# Altium PCB MainPCBV6.PcbDoc (part 5 of 5)
Units mm, origin at the board's own origin, x right, y up, seen from the top; angles counter-clockwise.
Board outline 176 x 144.01 mm, 2 copper layers (Top Layer, Bottom Layer); 220 components, 240 nets, 911 pads, 254 vias.
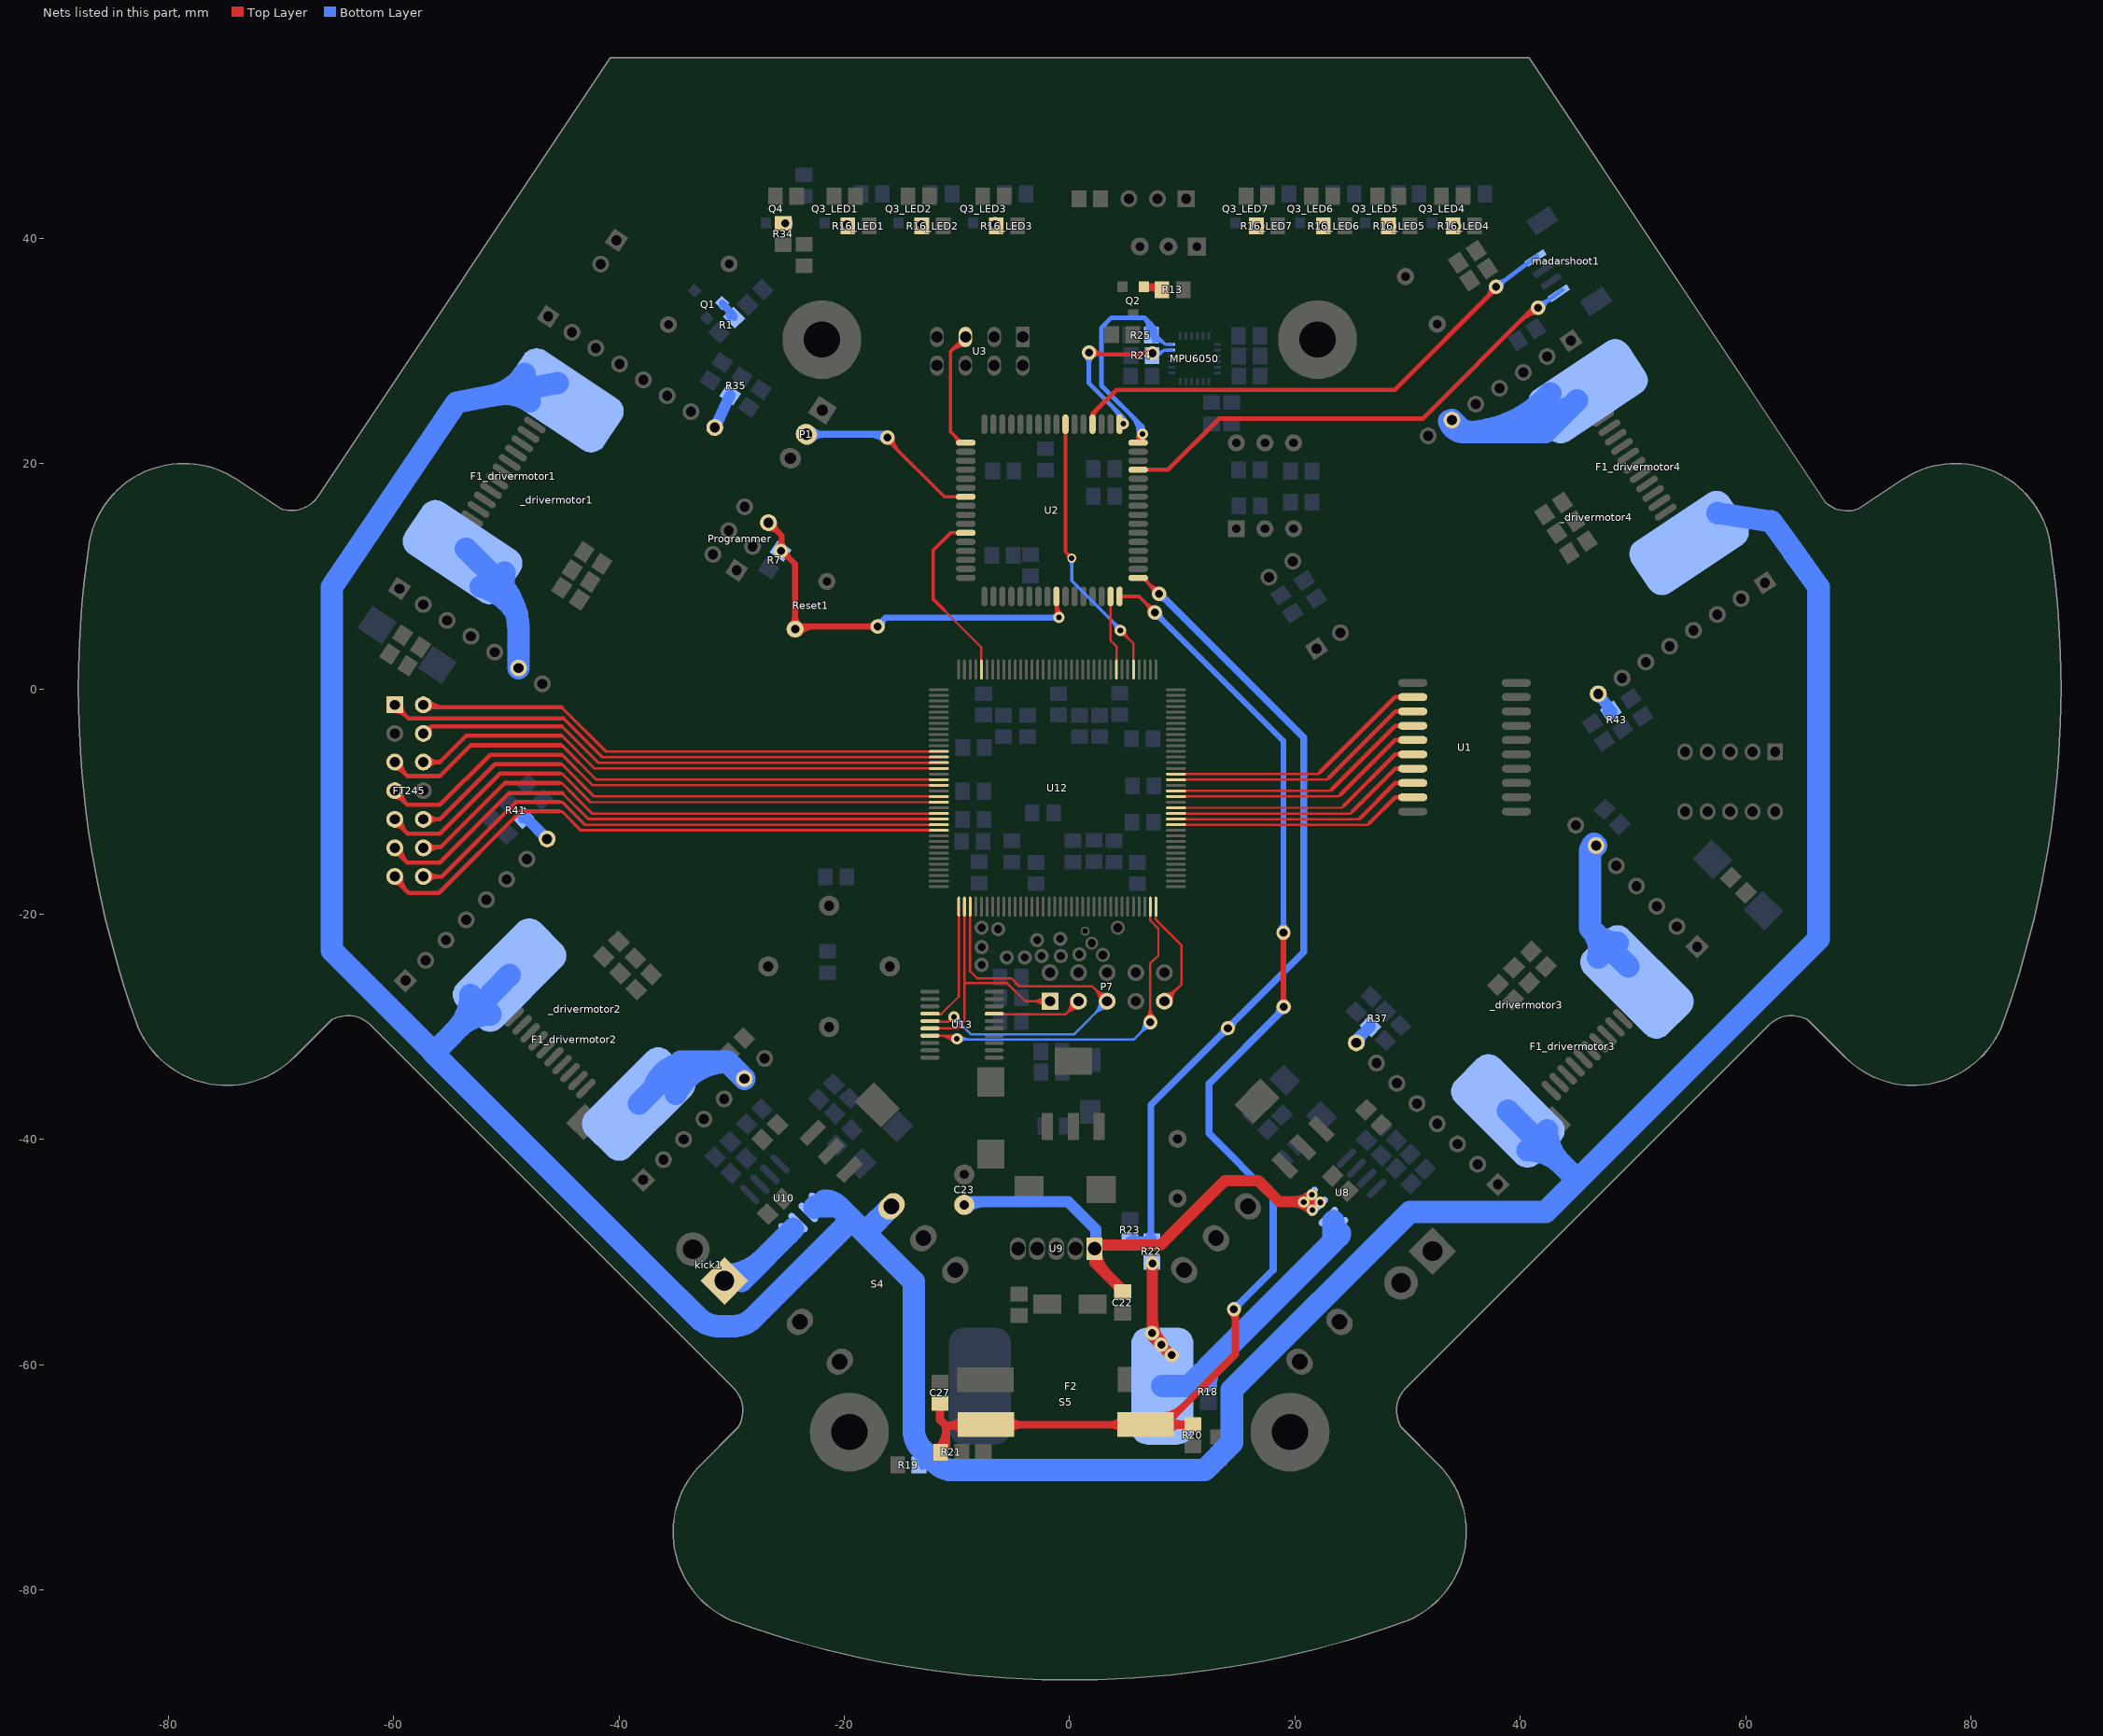
[diagram p5: the nets of this part, all layers, seen from the top]

## Via types
v1: diameter 1.27, hole 0.711, Top Layer to Bottom Layer, 214 vias
v2: diameter 1, hole 0.5, Top Layer to Bottom Layer, 17 vias
v3: diameter 2, hole 1, Top Layer to Bottom Layer, 11 vias
v4: diameter 0.8, hole 0.5, Top Layer to Bottom Layer, 8 vias
v5: diameter 1.778, hole 0.965, Top Layer to Bottom Layer, 3 vias
v6: diameter 0.75, hole 0.5, Top Layer to Bottom Layer, 1 vias

## Nets (pads, with @x,y where several pads share a name; then routed paths per layer and width w, separated by ;. In a path a pad name is that pad's centre, name@x,y a point inside that pad or via, vN(x,y) a via of type N, cw(c..) or ccw(c..) an arc to the next point about the centre after c; other vN are vias at no path point) (continued)
NetProgrammer_5: Programmer.5 R7.2 Reset1.2 U2.57 | length 50.2
  Top Layer w0.305: U2.57@-1.261,7.513 cw(c-1.471,7.304) -1.175,7.304 cw(c-0.879,7.304) U2.57@-1.088,7.513 ; -1.175,6.959 ccw(c-0.356,6.959) v2@-0.935,6.38 ; U2.57@-1.175,7.695 ccw(c0.38,7.695) v2@-0.719,6.596 ; U2.57@-1.175,8.2 -1.175,6.737 -1.067,6.629 -1.067,6.325 -1.016,6.274 -0.991,6.274 -0.965,6.299 v2(-0.965,6.35)
  Top Layer w0.508: Programmer.5@-26.744,14.248 cw(c-26.744,12.961) -25.834,13.871 ; Programmer.5@-26.721,14.757 -25.552,13.589 -25.552,12.268 -24.384,11.1 -24.384,5.41 -24.257,5.537 v1(-17.043,5.537) ; Programmer.5@-26.248,14.744 ccw(c-25.14,14.744) -25.924,13.96 ; v1@-25.898,12.512 ccw(c-26.732,13.347) -25.552,13.347 ; v1@-25.629,11.862 cw(c-25.629,10.697) -24.805,11.521 ; -25.552,12.979 ccw(c-24.893,12.979) v1@-25.359,12.512 ; v1@-25.248,12.243 ccw(c-24.573,12.243) -25.05,11.766 ; Reset1.2@-24.73,5.663 ccw(c-25.564,6.497) -24.384,6.497 ; -24.384,6.562 ccw(c-23.112,6.562) Reset1.2@-24.011,5.663 ; Reset1.2@-24.011,4.944 cw(c-22.58,3.513) -22.58,5.537 ; v1@-17.313,5.268 ccw(c-17.963,4.617) -17.963,5.537 ccw(c-17.963,6.457) v1@-17.313,5.807
  Bottom Layer w0.508: v1@-17.043,5.918 ccw(c-17.043,6.593) -16.566,6.116 ; v1@-16.713,5.969 -16.358,6.325 ; v1@-16.663,5.55 cw(c-15.62,5.587) -16.358,6.325 ; -1.62,6.325 ccw(c-1.62,7.005) v2@-1.139,6.524 ; -1.498,6.325 cw(c-1.498,5.817) v2@-1.139,6.176 ; v2(-0.965,6.35) -0.965,6.299 -0.991,6.274 -1.016,6.274 -1.067,6.325 -16.358,6.325
  other v1: -25.629,12.243
NetQ1_2: Q1.2 R1.2 | length 3.3
  Bottom Layer w0.6: Q1.2@-30.876,34.093 cw(c-31.042,33.472) -30.486,33.794 ; Q1.2@-30.855,34.256 -29.783,33.184 R1.2@-29.783,32.955 ; Q1.2@-30.613,34.014 cw(c-31.6,33.026) R1.2@-30.204,33.026
NetQ2_2: Q2.2 R13.1 | length 3.4
  Top Layer w0.6: Q2.2@6.589,35.692 7.935,35.692 R13.1@8.194,35.433 ; Q2.2@6.664,35.537 cw(c7.052,34.865) 7.253,35.615 ; Q2.2@6.964,35.692 cw(c6.964,34.303) R13.1@7.947,35.286
NetQ3_Led1_2: Q3_LED1.2 R16_LED1.2
  other v1: -19.761,41.224
NetQ3_Led2_2: Q3_LED2.2 R16_LED2.2
  other v1: -13.157,41.224
NetQ3_Led3_2: Q3_LED3.2 R16_LED3.2
  other v1: -6.629,41.25
NetQ3_LED4_2: Q3_LED4.2 R16_LED4.2
  other v1: 34.138,41.072
NetQ3_LED5_2: Q3_LED5.2 R16_LED5.2
  other v1: 28.372,41.072
NetQ3_LED6_2: Q3_LED6.2 R16_LED6.2
  other v1: 22.53,41.072
NetQ3_LED7_2: Q3_LED7.2 R16_LED7.2
  other v1: 16.637,41.072
NetQ4_2: Q4.2 R34.2
  other v1: -25.248,41.326
PARITY: U2.63 U12.44 | length 7.4
  Top Layer w0.203: U2.63@3.503,7.477 cw(c3.207,7.181) 3.625,7.181 cw(c4.044,7.181) U2.63@3.748,7.477 ; U2.63@3.625,8.2 3.625,4.3 4.158,3.767 U12.44@4.158,1.711
PROG_B: U12.143 U13.7 | length 43
  Top Layer w0.203: U13.7@-12.4,-30.845 -12.365,-30.81 -10.262,-30.81 v2(-10.008,-31.064) ; U13.7@-11.673,-30.743 ccw(c-11.511,-30.58) -11.511,-30.81 ; U13.7@-11.583,-30.81 cw(c-11.583,-32.639) v2@-10.289,-31.346 ; -11.092,-30.81 cw(c-11.092,-32.149) v2@-10.146,-31.202 ; -10.601,-30.81 cw(c-10.601,-31.658) v2@-10.002,-31.059 ; v1@6.786,-29.214 ccw(c5.936,-28.365) 7.137,-28.365 ; v1@6.929,-29.358 ccw(c6.427,-28.855) 7.137,-28.855 ; v1@7.137,-29.566 7.137,-24.409 7.874,-23.673 7.874,-21.285 7.158,-20.569 U12.143@7.158,-19.339 ; 7.137,-28.733 ccw(c8.021,-28.733) v1@7.396,-29.358 ; 7.137,-28.242 ccw(c8.512,-28.242) v1@7.54,-29.214
  Bottom Layer w0.203: v2@-9.957,-31.064 -9.906,-31.115 5.715,-31.115 7.048,-29.781 v1@7.252,-29.781 ; v2@-9.87,-30.926 ccw(c-9.414,-30.47) -9.414,-31.115 ; v2@-9.726,-31.346 cw(c-9.168,-31.903) -9.168,-31.115 ; v2@-9.726,-30.782 ccw(c-8.923,-29.98) -8.923,-31.115 ; 6.198,-30.632 ccw(c5.158,-29.591) v1@6.629,-29.591 ; 6.382,-30.448 cw(c7.163,-31.228) v1@7.163,-30.124 ; 6.545,-30.285 ccw(c5.851,-29.591) v1@6.833,-29.591 ; 6.729,-30.101 cw(c7.163,-30.534) v1@7.163,-29.921
  other v1: 7.163,-29.591
SCK: U2.33 U3.5 | length 13.9
  Top Layer w0.305: -10.592,22.809 -10.592,29.947 ; -10.566,22.809 -9.607,21.85 U2.33@-9.225,21.85 ; -10.188,22.431 cw(c-10.77,21.85) U2.33@-9.947,21.85 ; -10.079,30.46 cw(c-9.259,29.64) U3.5@-9.247,30.799 ; U3.5@-9.25,30.494 ccw(c-9.269,28.624) -10.592,29.947 ; U3.5@-9.22,31.318 -10.592,29.947
SCK_CUR1: U2.43 U12.68 | length 16.4
  Top Layer w0.203: -11.151,6.985 -7.849,3.683 -7.849,3.092 -7.842,3.085 U12.68@-7.842,1.711
  Top Layer w0.305: -11.151,6.985 -12.116,7.95 -12.116,12.301 -10.568,13.85 U2.43@-9.225,13.85 ; U2.43@-9.911,13.763 ccw(c-10.121,13.554) -10.121,13.85 ccw(c-10.121,14.146) U2.43@-9.911,13.936
SCK_CUR2: U2.23 U12.41 | length 29.5
  Top Layer w0.203: v2@4.496,4.783 cw(c4.496,3.821) 5.176,4.501 cw(c5.856,5.182) v2@4.894,5.182 ; v2(4.496,5.182) 5.658,4.02 U12.41@5.658,1.711
  Top Layer w0.305: U2.23@-0.461,22.813 cw(c-0.671,22.604) -0.375,22.604 cw(c-0.079,22.604) U2.23@-0.288,22.813 ; U2.23@-0.375,23.5 -0.375,12.16 v4(0.178,11.608) ; v4@-0.07,11.608 ccw(c-0.668,11.608) -0.245,12.03 ccw(c0.178,12.453) v4@0.178,11.855
  Bottom Layer w0.305: v4@0.003,11.433 cw(c-0.42,11.01) 0.178,11.01 cw(c0.776,11.01) v4@0.353,11.433 ; v4(0.178,11.608) 0.178,9.601 4.496,5.283 v2(4.496,5.182) ; 3.831,5.948 cw(c3.064,5.182) v2@4.148,5.182 ; 4.076,5.703 ccw(c4.496,6.123) v2@4.496,5.529
SEG1A: U1.9 U12.12 | length 22.6
  Top Layer w0.203: U12.12@9.433,-12.064 26.468,-12.064 26.645,-11.887
  Top Layer w0.381: 26.645,-11.887 28.905,-9.627 U1.9@30.452,-9.627 ; U1.9@29.389,-9.739 ccw(c29.117,-10.012) 29.117,-9.627 ccw(c29.117,-9.242) U1.9@29.389,-9.514
SEG1B: U1.4 U12.18 | length 24
  Top Layer w0.203: U12.18@9.433,-9.064 23.118,-9.064 23.266,-8.915
  Top Layer w0.381: 23.266,-8.915 28.905,-3.277 U1.4@30.452,-3.277 ; U1.4@29.389,-3.389 ccw(c29.117,-3.662) 29.117,-3.277 ccw(c29.117,-2.892) U1.4@29.389,-3.164
SEG1C: U1.3 U12.20 | length 24.2
  Top Layer w0.203: U12.20@9.433,-8.064 22.848,-8.064 23.012,-7.899
  Top Layer w0.381: 23.012,-7.899 28.905,-2.007 U1.3@30.452,-2.007 U1.3@30.401,-1.956 ; U1.3@29.389,-2.119 ccw(c29.117,-2.392) 29.117,-2.007 ccw(c29.117,-1.622) U1.3@29.389,-1.894
SEG1D: U1.5 U12.17 | length 23.7
  Top Layer w0.203: U12.17@9.433,-9.564 23.888,-9.564 24.066,-9.385
  Top Layer w0.381: 24.066,-9.385 28.905,-4.547 U1.5@30.452,-4.547 ; U1.5@29.389,-4.659 ccw(c29.117,-4.932) 29.117,-4.547 ccw(c29.117,-4.162) U1.5@29.389,-4.434
SEG1DP: U1.2 U12.21 | length 24.5
  Top Layer w0.203: U12.21@9.433,-7.564 22.078,-7.564 22.238,-7.404
  Top Layer w0.381: 22.238,-7.404 28.905,-0.737 U1.2@30.452,-0.737 ; U1.2@29.389,-0.849 ccw(c29.117,-1.122) 29.117,-0.737 ccw(c29.117,-0.352) U1.2@29.389,-0.624
SEG1E: U1.6 U12.15 | length 23.6
  Top Layer w0.203: U12.15@9.433,-10.564 24.158,-10.564 24.447,-10.274
  Top Layer w0.381: 24.447,-10.274 28.905,-5.817 U1.6@30.452,-5.817 ; U1.6@29.389,-5.929 ccw(c29.117,-6.202) 29.117,-5.817 ccw(c29.117,-5.432) U1.6@29.389,-5.704
SEG1F: U1.8 U12.13 | length 23
  Top Layer w0.203: U12.13@9.433,-11.564 25.698,-11.564 25.832,-11.43
  Top Layer w0.381: 25.832,-11.43 28.905,-8.357 U1.8@30.452,-8.357 ; U1.8@29.389,-8.469 ccw(c29.117,-8.742) 29.117,-8.357 ccw(c29.117,-7.972) U1.8@29.389,-8.244
SEG1G: U1.7 U12.14 | length 23.3
  Top Layer w0.203: U12.14@9.433,-11.064 24.928,-11.064 25.146,-10.846
  Top Layer w0.381: 25.146,-10.846 28.905,-7.087 U1.7@30.452,-7.087 ; U1.7@29.389,-7.199 ccw(c29.117,-7.472) 29.117,-7.087 ccw(c29.117,-6.702) U1.7@29.389,-6.974
SEN-SCL: MPU6050.23 R24.2 U2.17 | length 26
  Top Layer w0.4: v1@1.702,29.845 1.854,29.693 7.182,29.693 7.334,29.54 7.366,29.572 7.366,29.667 7.341,29.693 v1(7.341,29.794) ; v1@2.035,29.537 cw(c2.409,29.163) 2.409,29.693 ; v1@2.035,30.153 ccw(c3.145,31.263) 3.145,29.693 ; U2.17@4.425,23.5 v2@4.826,23.5 ; 6.045,29.693 ccw(c6.045,31.09) v1@7.033,30.102 ; 6.536,29.693 cw(c6.536,28.989) v1@7.033,29.487
  Bottom Layer w0.254: R24.2@7.336,29.702 ccw(c7.673,30.039) 8.01,29.702 ; v1(7.341,29.794) 7.341,29.693 7.366,29.667 7.366,29.572 7.334,29.54 7.849,29.54 8.37,30.062 ; R24.2@7.515,29.881 ccw(c7.853,30.219) 8.19,29.882 ; R24.2@7.695,30.061 ccw(c8.032,30.399) 8.37,30.062 ; MPU6050.23@9.057,30.062 8.37,30.062
  Bottom Layer w0.4: v1@1.42,29.537 cw(c0.738,28.856) 1.702,28.856 ; 1.702,28.733 cw(c2.839,28.733) v1@2.035,29.537 ; v1@1.702,29.439 1.702,27.127 4.775,24.054 ; 3.904,24.925 cw(c2.525,23.546) v2@4.475,23.546 ; 4.587,24.242 cw(c3.89,23.546) v2@4.875,23.546 ; v2@4.63,23.809 ccw(c4.495,24.054) 4.775,24.054 ; v2@4.775,23.444 4.775,24.054 ; v2@4.92,23.809 cw(c5.055,24.054) 4.775,24.054
  other v1: 1.727,29.845
  other v2: 4.775,23.546
SEN-SDA: MPU6050.24 R25.2 U2.16 | length 33.1
  Top Layer w0.4: U2.16@6.075,21.764 cw(c6.67,21.764) v2@6.525,22.34 ; U2.16@6.075,21.85 6.075,22.255 ; 6.075,22.277 cw(c6.541,22.277) v2@6.427,22.728 ; v2@6.16,22.56 cw(c5.847,22.483) 6.075,22.255 ; v2@6.38,22.34 ccw(c6.303,22.027) 6.075,22.255 ; v2(6.452,22.631) 6.075,22.255
  Bottom Layer w0.254: R25.2@7.254,31.28 cw(c7.476,30.666) 7.938,31.128 ; R25.2@7.292,31.302 7.764,31.302 8.504,30.562 ; R25.2@7.34,31.041 cw(c7.626,30.25) 8.221,30.845 ; R25.2@7.426,30.802 cw(c7.775,29.833) 8.504,30.562 ; MPU6050.24@9.057,30.562 8.504,30.562
  Bottom Layer w0.4: 5.472,24.271 cw(c3.833,22.631) v2@6.152,22.631 ; 6.155,23.588 cw(c5.199,22.631) v2@6.552,22.631 ; v2@6.254,22.857 ccw(c5.875,23.292) 6.452,23.292 ; v2(6.452,22.631) 6.452,23.292 ; v2@6.649,22.857 cw(c7.028,23.292) 6.452,23.292 ; R25.2@6.843,31.689 ccw(c5.851,32.165) 6.629,32.944 ; 7.029,32.545 cw(c6.391,31.906) R25.2@7.204,31.516 ; R25.2@7.053,31.899 ccw(c6.867,32.281) 7.292,32.281 ; R25.2@7.292,31.302 7.292,32.281 ; 7.428,32.145 cw(c6.93,31.648) R25.2@7.565,31.343 ; R25.2@7.509,31.862 cw(c7.806,32.281) 7.292,32.281 ; 6.452,23.292 2.819,26.924 2.819,32.055 3.708,32.944 6.629,32.944 ; 6.629,32.944 7.292,32.281
ST_SHG: madarshoot1.4 U2.20 | length 49.9
  Top Layer w0.4: U2.20@2.025,23.5 2.025,24.403 4.166,26.543 28.854,26.543 v1@37.821,35.509 ; U2.20@2.1,24.1 cw(c3.013,24.1) 2.367,24.745 ; 36.996,34.684 ccw(c35.993,35.687) v1@37.411,35.687 ; 37.364,35.052 cw(c37.846,34.57) v1@37.846,35.252
  Bottom Layer w0.4: v1(37.846,35.687) 41.32,38.286 madarshoot1.4@41.478,38.405 ; v1@37.908,36.118 ccw(c38.058,37.157) 38.687,36.316 ccw(c39.316,35.475) v1@38.277,35.625
SW1: F2.1 R18.2 R22.2 U8.1 U8.2 | length 41.2
  Top Layer w1: 7.341,-55.99 ccw(c10.355,-55.99) v1@8.223,-58.121 ; v1(7.341,-51.003) 7.341,-57.48 v1@8.915,-59.055 ; v1@7.45,-57.201 ccw(c8.389,-57.201) v1@7.725,-57.865 ; v1@7.607,-57.66 ccw(c8.4,-57.202) v1@8.163,-58.086
  Bottom Layer w0.5: R18.2@12.111,-61.2 ccw(c11.485,-60.575) 12.37,-60.575 ; 12.192,-60.198 12.243,-60.249 12.37,-60.376 R18.2@12.37,-61.382 ; 12.37,-60.46 ccw(c13.417,-60.46) R18.2@12.676,-61.2
  Bottom Layer w1: R22.2@7.278,-51.003 R22.2@7.278,-50.938
  Bottom Layer w2: F2.1@8.227,-61.9 10.592,-61.9 11.74,-60.752 ; F2.1@10.768,-61.724 cw(c12.194,-63.15) R18.2@12.194,-61.133 ; R18.2@12.044,-61.483 cw(c14.543,-61.483) 12.776,-59.716 ; 12.243,-60.249 23.419,-49.073 23.419,-47.295 ; 23.866,-48.625 ccw(c23.555,-48.314) 23.995,-48.314 cw(c23.555,-48.314) 23.866,-48.625
  other v1: 9.042,-59.157 8.128,-58.217 7.315,-57.201
SW2: F1_drivermotor1.2 F1_drivermotor2.2 F1_drivermotor3.2 F1_drivermotor4.2 R19.2 S4.1 U10.1 U10.2 | length 344.6
  Bottom Layer w0.5: R19.2@-13.198,-68.859 -11.836,-68.859 ; R19.2@-13.093,-69.093 cw(c-12.529,-69.657) -12.529,-68.859 ; R19.2@-13.093,-68.527 ccw(c-12.291,-67.726) -12.291,-68.859
  Bottom Layer w2: -65.507,-22.987 -65.507,-23.216 -65.498,-23.224 ; -56.464,-32.36 -34.633,-54.191 ; -54.431,-30.266 ccw(c-57.552,-27.236) F1_drivermotor2.2@-53.203,-27.171 ; -54.308,-30.139 cw(c-51.365,-32.995) F1_drivermotor2.2@-51.427,-28.895 ; -51.322,26.018 ccw(c-52.193,30.513) F1_drivermotor1.2@-48.399,27.95 ; -50.831,26.113 cw(c-50.094,22.312) F1_drivermotor1.2@-47.928,25.521 ; F1_drivermotor2.2@-49.72,-25.413 -56.413,-32.309 -65.498,-23.224 ; F1_drivermotor1.2@-45.466,27.153 -54.436,25.414 -65.498,9.034 -65.498,-23.224 ; -34.62,-54.178 -32.951,-55.847 ccw(c-31.155,-54.051) -31.513,-56.566 ccw(c-31.155,-54.051) -31.155,-56.591 -29.881,-56.591 ccw(c-29.881,-54.051) -29.523,-56.566 ccw(c-29.881,-54.051) -28.085,-55.847 -19.355,-47.117 ; -22.657,-46.05 -22.553,-45.947 -20.523,-45.947 -20.523,-45.949 ; -21.77,-45.454 cw(c-21.72,-47.145) -20.523,-45.949 ; -21.749,-45.453 cw(c-21.749,-47.217) -20.502,-45.97 ; S4.1@-15.816,-45.947 -17.996,-48.127 -17.996,-48.476 ; -12.002,-68.643 -13.099,-67.546 cw(c-11.303,-65.75) -13.843,-65.75 -13.843,-52.629 -17.996,-48.476 ; -11.801,-68.824 ccw(c-10.206,-66.847) -10.518,-69.367 11.963,-69.367 14.402,-66.929 14.402,-62.23 30.201,-46.431 42.24,-46.431 45.072,-43.599 ; F1_drivermotor3.2@38.9,-37.478 45.072,-43.599 ; F1_drivermotor3.2@40.64,-40.96 cw(c40.657,-45.219) 43.657,-42.195 ; F1_drivermotor3.2@42.383,-39.203 ccw(c46.573,-39.186) 43.622,-42.161 ; 45.085,-43.612 45.072,-43.599 ; F1_drivermotor4.2@57.531,15.596 62.275,14.858 64.186,12.243 66.472,9.043 66.472,-22.2 45.072,-43.599 ; -20.523,-45.949 -19.355,-47.117 ; -19.355,-47.117 -17.996,-48.476
SW-CAP: C27.1 R20.2 R21.2 S5.1 U2.64 | length 145.1
  Top Layer w0.305: U2.64@4.425,8.2 6.151,8.2 v1(7.569,6.782) ; U2.64@4.512,8.113 cw(c4.721,7.904) 4.721,8.2 cw(c4.721,8.496) U2.64@4.512,8.286 ; v1@7.087,6.782 ccw(c5.921,6.782) 6.745,7.606 ccw(c7.569,8.43) v1@7.569,7.264
  Top Layer w0.508: v1@18.704,-21.91 cw(c18.054,-22.561) 18.974,-22.561 cw(c19.894,-22.561) v1@19.243,-21.91 ; v1@18.73,-27.975 ccw(c18.141,-27.386) 18.974,-27.386 ; 18.974,-27.264 ccw(c19.98,-27.264) v1@19.269,-27.975 ; v1(18.974,-21.641) 18.974,-28.219 v1(18.999,-28.245)
  Top Layer w0.635: S5.1@-7.442,-65.329 S5.1@6.731,-65.329 ; S5.1@-5.489,-65.882 cw(c-4.153,-67.218) -4.153,-65.329 cw(c-4.153,-63.44) S5.1@-5.489,-64.775 ; S5.1@4.778,-65.882 ccw(c3.442,-67.218) 3.442,-65.329 ccw(c3.442,-63.44) S5.1@4.778,-64.775 ; S5.1@8.131,-64.546 ccw(c8.131,-61.867) 10.025,-63.762 ; S5.1@8.458,-65.329 14.707,-59.08 v1@14.707,-55.118 ; S5.1@8.914,-65.329 cw(c10.013,-65.329) 9.235,-64.552 ; v1@14.355,-55.317 cw(c13.506,-56.166) 14.707,-56.166
  Top Layer w0.75: C27.1@-11.701,-63.628 cw(c-12.17,-64.098) -11.506,-64.098 cw(c-10.842,-64.098) C27.1@-11.312,-63.628 ; R21.2@-11.66,-67.473 ccw(c-13.319,-65.814) -10.973,-65.814 ; R21.2@-11.608,-67.742 -10.973,-67.107 -10.973,-65.43 ; C27.1@-11.506,-63.434 -11.506,-64.897 -10.973,-65.43 ; -10.838,-65.43 ccw(c-10.838,-63.333) S5.1@-9.355,-64.816 ; -10.347,-65.43 cw(c-10.347,-66.834) S5.1@-9.355,-65.841 ; S5.1@-7.264,-65.43 -10.973,-65.43 ; S5.1@6.731,-65.329 8.458,-65.329 10.719,-65.329 R20.2@10.871,-65.176 ; S5.1@8.644,-65.841 cw(c9.881,-67.079) 9.881,-65.329 cw(c9.881,-63.578) S5.1@8.644,-64.816 ; 10.133,-65.329 ccw(c10.133,-64.63) R20.2@10.628,-65.124
  Bottom Layer w0.508: v1@7.569,6.401 cw(c7.569,5.481) 8.22,6.131 cw(c8.87,6.782) v1@7.95,6.782 ; v1(7.569,6.782) 18.974,-4.623 v1(18.974,-21.641) ; v1@18.704,-21.371 ccw(c18.054,-20.721) 18.974,-20.721 ccw(c19.894,-20.721) v1@19.243,-21.371
  Bottom Layer w0.635: v1(14.58,-55.093) 18.059,-51.613 18.059,-45.161 12.37,-39.472 12.37,-35.052 v1@18.771,-28.651 ; v1@14.58,-54.775 ccw(c14.58,-54.009) 15.122,-54.551 ccw(c15.664,-55.093) v1@14.897,-55.093 ; 18.331,-29.09 ccw(c17.486,-28.245) v1@18.682,-28.245
TCK: P7.1 U12.110 U13.6 | length 26
  Top Layer w0.203: U13.6@-12.4,-30.195 -12.355,-30.15 -9.982,-30.15 -9.342,-29.51 U12.110@-9.342,-19.339 ; U13.6@-11.673,-30.093 ccw(c-11.536,-29.955) -11.536,-30.15 ; -9.322,-26.137 -5.537,-26.137 -3.937,-27.737 P7.1@-1.753,-27.737 ; P7.1@-2.211,-28.195 ccw(c-3.318,-29.302) -3.318,-27.737 ccw(c-3.318,-26.171) P7.1@-2.211,-27.278 ; P7.1@-2.067,-28.052 ccw(c-2.827,-28.812) -2.827,-27.737 ccw(c-2.827,-26.662) P7.1@-2.067,-27.422
TDI: P7.9 U12.144 | length 14.1
  Top Layer w0.203: U12.144@7.658,-19.339 7.658,-20.499 8.607,-21.448 8.607,-21.46 9.931,-22.784 9.931,-26.213 P7.9@8.407,-27.737 ; P7.9@8.407,-27.292 ccw(c8.407,-26.217) 9.167,-26.977 ccw(c9.927,-27.737) P7.9@8.853,-27.737 ; P7.9@8.407,-27.088 ccw(c8.407,-25.523) 9.514,-26.63 ccw(c10.621,-27.737) P7.9@9.056,-27.737
TDO: P7.3 U13.17 | length 12.9
  Top Layer w0.203: U13.17@-6.7,-28.895 -0.371,-28.895 P7.3@0.787,-27.737 ; U13.17@-5.974,-28.793 ccw(c-5.726,-28.545) -5.726,-28.895 ; P7.3@0.139,-27.737 cw(c-1.426,-27.737) -0.319,-28.844 cw(c0.787,-29.951) P7.3@0.787,-28.385 ; P7.3@0.342,-27.737 cw(c-0.733,-27.737) 0.027,-28.497 cw(c0.787,-29.257) P7.3@0.787,-28.182
  Bottom Layer w0.203: P7.3@0.254,-27.737 P7.3@0.787,-27.737
TDO_OUT: U12.109 U13.4 | length 11.5
  Top Layer w0.203: U13.4@-12.4,-28.895 -11.42,-28.895 -9.842,-27.317 U12.109@-9.842,-19.339 ; U13.4@-11.673,-28.793 ccw(c-11.426,-28.545) -11.426,-28.895
TMS: P7.5 U12.111 U13.5 | length 48.2
  Top Layer w0.203: U13.5@-12.4,-29.545 -10.826,-29.545 ; U13.5@-11.673,-29.443 ccw(c-11.426,-29.195) -11.426,-29.545 ; v2@-10.66,-29.123 cw(c-11.227,-29.144) -10.826,-29.545 ; v2@-10.425,-29.472 ccw(c-10.572,-29.799) -10.826,-29.545 ; v2@-10.287,-29.007 -10.826,-29.545 ; U12.111@-8.842,-19.339 -8.842,-25.067 -8.204,-25.705 -5.182,-25.705 -4.47,-26.416 2.007,-26.416 P7.5@3.327,-27.737 ; P7.5@2.679,-27.737 ccw(c1.114,-27.737) 2.221,-26.63 ccw(c3.327,-25.523) P7.5@3.327,-27.088 ; P7.5@2.882,-27.737 ccw(c1.807,-27.737) 2.567,-26.977 ccw(c3.327,-26.217) P7.5@3.327,-27.292
  Bottom Layer w0.203: v2@-10.262,-29.507 cw(c-10.262,-30.346) -9.668,-29.753 ; v2@-10.109,-29.134 -10.109,-29.312 -8.738,-30.683 0.381,-30.683 P7.5@3.327,-27.737 ; v2@-10.066,-29.108 ccw(c-9.473,-29.108) -9.892,-29.528 ; v2@-9.863,-29.108 ccw(c-8.779,-29.108) -9.546,-29.875 ; P7.5@2.679,-27.737 cw(c1.114,-27.737) 2.221,-28.844 cw(c3.327,-29.951) P7.5@3.327,-28.385 ; P7.5@2.882,-27.737 cw(c1.807,-27.737) 2.567,-28.497 cw(c3.327,-29.257) P7.5@3.327,-28.182
  other v2: -10.262,-29.108
TX: P1.2 U2.39 | length 23.2
  Top Layer w0.305: v1@-16.256,22.174 -11.131,17.05 U2.39@-9.225,17.05 ; v1@-16.18,21.819 cw(c-16.18,21.144) -15.703,21.621 ; v1@-16.002,22.301 ccw(c-15.082,22.301) -15.733,21.651 ; v1@-15.697,22.301 ccw(c-14.042,22.301) -15.212,21.13 ; U2.39@-9.911,16.963 ccw(c-10.121,16.754) -10.121,17.05 ccw(c-10.121,17.346) U2.39@-9.911,17.136
  Bottom Layer w0.635: P1.2@-23.371,22.601 -16.556,22.601 v1@-16.154,22.2 ; P1.2@-22.918,22.162 cw(c-21.856,21.1) -21.856,22.601 ; P1.2@-22.918,22.985 ccw(c-21.99,23.913) -21.99,22.601 ; -17.671,22.601 cw(c-17.671,20.81) v1@-16.404,22.077
  other v1: -16.18,22.301
USB_D0: FT245.2 U12.84 | length 49.9
  Top Layer w0.203: -41.198,-5.564 U12.84@-11.617,-5.564
  Top Layer w0.254: -45.085,-1.651 -41.198,-5.538
  Top Layer w0.381: FT245.2@-57.252,-1.296 ccw(c-56.396,-0.44) -56.396,-1.651 ; FT245.2@-56.983,-1.818 cw(c-56.58,-2.221) -56.58,-1.651 ; FT245.2@-56.983,-1.027 ccw(c-55.476,0.48) -55.476,-1.651 ; FT245.2@-56.871,-1.676 -56.845,-1.651 -45.085,-1.651
USB_D1: FT245.6 U12.87 | length 50
  Top Layer w0.203: -42.212,-7.064 U12.87@-11.617,-7.064
  Top Layer w0.254: -45.123,-4.171 -45.08,-4.171 -42.212,-7.038
  Top Layer w0.381: FT245.6@-57.379,-6.502 -55.905,-6.502 -53.574,-4.171 -45.123,-4.171 ; FT245.6@-56.983,-6.898 cw(c-56.028,-7.853) -56.028,-6.502 cw(c-56.028,-5.152) FT245.6@-56.983,-6.107
USB_D2: FT245.4 U12.86 | length 48.5
  Top Layer w0.203: -41.874,-6.564 U12.86@-11.617,-6.564
  Top Layer w0.254: -45.082,-3.331 -41.874,-6.538
  Top Layer w0.381: FT245.4@-57.379,-4.039 -56.671,-3.331 ; FT245.4@-57.179,-3.44 ccw(c-57.009,-2.993) -56.671,-3.331 ; FT245.4@-56.83,-3.854 cw(c-56.261,-3.741) -56.671,-3.331 ; -45.082,-3.331 -56.671,-3.331
USB_D3: FT245.9 U12.93 | length 54.2
  Top Layer w0.203: -42.565,-10.064 U12.93@-11.617,-10.064
  Top Layer w0.254: -45.263,-7.53 -45.073,-7.53 -42.565,-10.038
  Top Layer w0.381: FT245.9@-59.944,-11.684 -58.767,-12.861 -55.905,-12.861 -50.575,-7.53 -45.263,-7.53 ; FT245.9@-59.919,-12.142 cw(c-59.919,-13.186) -59.18,-12.448 ; FT245.9@-59.359,-11.582 ccw(c-57.702,-11.582) -58.874,-12.754
USB_D4: FT245.1 U12.85 | length 52.4
  Top Layer w0.203: -41.536,-6.064 U12.85@-11.617,-6.064
  Top Layer w0.254: -44.941,-2.633 -41.536,-6.038
  Top Layer w0.381: FT245.1@-60.033,-1.435 FT245.1@-59.982,-1.486 ; FT245.1@-59.919,-1.982 cw(c-59.919,-3.333) -58.963,-2.378 cw(c-58.008,-1.422) FT245.1@-59.359,-1.422 ; FT245.1@-59.919,-1.422 -58.708,-2.633 -44.941,-2.633
USB_D5: FT245.7 U12.90 | length 53.8
  Top Layer w0.203: -42.389,-8.564 U12.90@-11.617,-8.564
  Top Layer w0.254: -45.101,-5.826 -42.389,-8.538
  Top Layer w0.381: FT245.7@-59.919,-9.602 cw(c-59.919,-10.585) -59.224,-9.89 ; FT245.7@-59.893,-9.22 -58.809,-10.304 -55.905,-10.304 -51.452,-5.851 -45.15,-5.851 ; FT245.7@-59.359,-9.042 ccw(c-57.64,-9.042) -58.856,-10.258
USB_D6: FT245.10 U12.92 | length 51.1
  Top Layer w0.203: -42.316,-9.474 -42.227,-9.564 U12.92@-11.617,-9.564
  Top Layer w0.254: -45.237,-6.691 -45.075,-6.691 -43.726,-8.039 -43.726,-8.065 -42.316,-9.474
  Top Layer w0.381: FT245.10@-57.379,-11.582 -55.905,-11.582 -51.014,-6.691 -45.237,-6.691 ; FT245.10@-56.983,-11.978 cw(c-56.028,-12.933) -56.028,-11.582 cw(c-56.028,-10.232) FT245.10@-56.983,-11.187
USB_D7: FT245.5 U12.89 | length 53.4
  Top Layer w0.203: -42.05,-8.064 U12.89@-11.617,-8.064
  Top Layer w0.254: -45.101,-4.988 -42.05,-8.038
  Top Layer w0.381: FT245.5@-60.071,-6.477 -58.801,-7.747 -55.905,-7.747 -53.169,-5.011 -45.164,-5.011 ; FT245.5@-59.919,-7.062 cw(c-59.919,-8.106) -59.18,-7.368 ; FT245.5@-59.359,-6.502 ccw(c-57.702,-6.502) -58.874,-7.674
USB_RD#: FT245.11 U12.96 | length 54.6
  Top Layer w0.254: -45.031,-9.274 -42.741,-11.564 U12.96@-11.617,-11.564
  Top Layer w0.381: FT245.11@-60.096,-14.122 -58.801,-15.418 -55.905,-15.418 -49.761,-9.274 -45.031,-9.274 ; FT245.11@-59.919,-14.682 cw(c-59.919,-15.603) -59.267,-14.952 ; FT245.11@-59.359,-14.122 ccw(c-57.579,-14.122) -58.838,-15.381
USB_RXF#: FT245.13 U12.98 | length 55.8
  Top Layer w0.254: -45.314,-10.89 -45.066,-10.89 -43.392,-12.564 ; -43.418,-12.564 -43.392,-12.564 ; U12.98@-11.617,-12.564 -43.392,-12.564
  Top Layer w0.381: FT245.13@-59.919,-17.222 cw(c-59.919,-18.021) -59.354,-17.456 ; FT245.13@-59.842,-16.535 -59.842,-16.967 -58.674,-18.136 -56.007,-18.136 -48.762,-10.89 -45.314,-10.89 ; FT245.13@-59.74,-16.662 ccw(c-58.757,-16.662) -59.452,-17.357 ; FT245.13@-59.359,-16.662 ccw(c-57.456,-16.662) -58.802,-18.008
USB_TXE#: FT245.14 U12.97 | length 51.6
  Top Layer w0.203: -43.08,-12.064 U12.97@-11.617,-12.064
  Top Layer w0.254: FT245.14@-57.379,-16.662 FT245.14@-57.252,-16.662 ; -45.314,-10.05 -45.068,-10.05 -43.08,-12.038
  Top Layer w0.381: FT245.14@-57.328,-16.586 -57.252,-16.662 -55.753,-16.662 -49.141,-10.05 -45.314,-10.05 ; FT245.14@-56.983,-17.058 cw(c-56.028,-18.013) -56.028,-16.662 cw(c-56.028,-15.312) FT245.14@-56.983,-16.267
USB_WR: FT245.12 U12.95 | length 51.4
  Top Layer w0.203: -42.403,-11.064 U12.95@-11.617,-11.064
  Top Layer w0.254: -45.288,-8.37 -45.071,-8.37 -43.942,-9.5 -43.942,-9.525 -42.403,-11.064
  Top Layer w0.381: FT245.12@-57.404,-14.046 -55.829,-14.046 -50.153,-8.37 -45.288,-8.37 ; FT245.12@-56.983,-14.518 cw(c-55.844,-15.657) -55.844,-14.046 ; FT245.12@-56.983,-13.727 ccw(c-56.212,-12.956) -56.212,-14.046
VBACK: madarshoot1.1 U2.13 | length 48.1
  Top Layer w0.4: U2.13@6.075,19.45 8.731,19.45 13.259,23.978 31.344,23.978 41.262,33.896 v1@41.491,33.896 ; 40.187,32.821 cw(c41.58,31.428) v1@41.58,33.398 ; 40.87,33.504 cw(c41.58,32.793) v1@41.58,33.798
  Bottom Layer w0.4: v1(41.58,33.833) 43.403,35.163 madarshoot1.1@43.739,35.408 ; v1@41.647,34.263 ccw(c41.809,35.3) 42.428,34.452 ccw(c43.047,33.603) v1@42.01,33.766
VFB_BATTERY: pad.1 R22.1 R23.2 U2.1 | length 81.1
  Top Layer w0.305: U2.1@6.075,9.85 6.508,9.85 v1(7.925,8.433) ; U2.1@6.798,9.85 ccw(c7.497,9.85) 7.003,9.355 ; v1@7.442,8.433 ccw(c6.277,8.433) 7.101,9.257 ccw(c7.925,10.081) v1@7.925,8.915
  Bottom Layer w0.6: R22.1@6.942,-48.764 ccw(c6.287,-48.109) 7.214,-48.109 ; R22.1@7.214,-48.997 7.214,-36.935 20.777,-23.372 20.777,-4.318 8.026,8.433 v1(7.925,8.433) ; 7.214,-48.224 ccw(c7.977,-48.224) R22.1@7.437,-48.764 ; R22.1@7.278,-49.038 R22.1@7.292,-49.024 ; R22.1@7.28,-49.012 R22.1@7.292,-49.024 ; R22.1@7.391,-49.124 R22.1@7.292,-49.024 ; v1@7.925,8.098 cw(c7.925,7.044) 8.67,7.789 ; v1@8.26,8.433 ccw(c8.823,8.433) 8.425,8.034 ; 13.437,-30.712 cw(c14.046,-31.321) pad.1@14.046,-30.459 ; 13.49,-30.659 ccw(c12.955,-30.124) pad.1@13.711,-30.124 ; pad.1@14.046,-29.789 ccw(c14.046,-29.033) 14.581,-29.568 ; pad.1@14.381,-30.124 cw(c15.243,-30.124) 14.633,-29.515
  Bottom Layer w0.8: R23.2@5.334,-49.012 R22.1@7.28,-49.012 ; R23.2@5.636,-48.805 ccw(c6.136,-48.304) 6.136,-49.012
VFB_MOTOR1: _drivermotor1.1 R35.2 | length 3.5
  Bottom Layer w0.508: R35.2@-30.378,25.873 R35.2@-30.143,26.108
  Bottom Layer w1: _drivermotor1.1@-31.502,23.194 R35.2@-30.15,26.06
VFB_MOTOR2: _drivermotor2.1 R41.2 | length 2.9
  Bottom Layer w1: R41.2@-48.503,-11.467 -48.249,-11.467 _drivermotor2.1@-46.355,-13.36
VFB_MOTOR3: _drivermotor3.1 R37.2 | length 2.9
  Bottom Layer w1: _drivermotor3.1@25.443,-31.429 25.443,-31.199 R37.2@26.695,-29.947 ; _drivermotor3.1@25.693,-31.429 cw(c26.85,-31.429) 26.031,-30.611
VFB_MOTOR4: _drivermotor4.1 R43.2 | length 2.7
  Bottom Layer w1: _drivermotor4.1@46.922,-0.443 48.076,-1.949 R43.2@48.158,-2.057 ; 47.635,-1.374 cw(c46.948,-1.9) R43.2@47.806,-2.014
VKICKER: kick1.1 U10.3 U10.4 | length 12.1
  Bottom Layer w1.5: kick1.1@-30.655,-52.556 kick1.1@-29.137,-52.556 ; -24.562,-47.981 -24.562,-47.701
  Bottom Layer w2: kick1.1@-30.655,-52.056 ccw(c-30.655,-47.184) -27.21,-50.629 ; kick1.1@-29.137,-52.556 -24.562,-47.981
VMOTOR_drivermotor1: _drivermotor1.10 F1_drivermotor1.1 | length 18.8
  Bottom Layer w2: F1_drivermotor1.1@-53.591,12.437 -50.761,9.608 cw(c-55.164,5.205) -48.938,5.205 _drivermotor1.10@-48.938,1.849 ; F1_drivermotor1.1@-52.282,9.076 cw(c-53.544,4.036) -49.044,6.633 ; F1_drivermotor1.1@-50.167,10.321 ccw(c-47.294,9.551) -49.87,8.064
VMOTOR_drivermotor2: _drivermotor2.10 F1_drivermotor2.1 | length 21
  Bottom Layer w2: F1_drivermotor2.1@-38.252,-36.83 -34.544,-33.122 -30.366,-33.122 _drivermotor2.10@-28.878,-34.61 ; F1_drivermotor2.1@-36.755,-35.021 cw(c-33.643,-36.621) -33.643,-33.122 ; F1_drivermotor2.1@-34.976,-35.936 cw(c-30.366,-38.305) -30.366,-33.122
VMOTOR_drivermotor3: _drivermotor3.10 F1_drivermotor3.1 | length 18.3
  Bottom Layer w2: 46.203,-14.577 cw(c47.385,-14.577) _drivermotor3.10@46.549,-13.74 ; 46.677,-21.734 ccw(c48.623,-19.788) F1_drivermotor3.1@48.623,-22.54 ; _drivermotor3.10@46.726,-13.917 46.203,-14.44 46.203,-21.26 ; F1_drivermotor3.1@46.925,-23.866 ccw(c44.261,-23.201) 46.203,-21.26 ; F1_drivermotor3.1@49.606,-24.663 46.203,-21.26
VMOTOR_drivermotor4: _drivermotor4.10 F1_drivermotor4.1 | length 30.9
  Bottom Layer w2: _drivermotor4.10@33.683,23.796 ccw(c35.002,24.149) 35.002,22.784 ; _drivermotor4.10@33.748,23.684 ccw(c35.921,25.858) 35.921,22.784 ; _drivermotor4.10@33.924,23.861 35.002,22.784 ; 35.002,22.784 ccw(c35.002,33.009) F1_drivermotor4.1@42.654,26.226 ; 39.448,22.784 ccw(c39.448,29.069) F1_drivermotor4.1@44.151,24.9 ; F1_drivermotor4.1@45.034,25.603 42.215,22.784 35.002,22.784
VSS: C22.2 C23.2 U8.3 U8.4 U9.1 | length 49.9
  Top Layer w1: U9.1@2.406,-50.008 ccw(c5.038,-50.008) 3.177,-51.869 ; 4.172,-52.863 cw(c3.502,-53.533) C22.2@4.449,-53.533 ; C22.2@4.674,-53.594 4.674,-53.365 2.261,-50.952 2.261,-49.378 8.052,-49.378 13.767,-43.663 16.739,-43.663 18.593,-45.517 21.717,-45.517 ; 19.7,-45.517 cw(c19.7,-48.118) v2@21.539,-46.279 ; 20.042,-45.517 ccw(c20.042,-43.435) v2@21.514,-44.907
  Bottom Layer w1: C23.2@-9.076,-46.099 cw(c-7.731,-47.443) -7.731,-45.542 ; C23.2@-8.66,-45.542 -0.127,-45.542 2.311,-47.981 U9.1@2.311,-49.428 ; U9.1@2.065,-49.266 ccw(c1.469,-48.671) 2.311,-48.671
  other v2: 21.539,-46.279 22.25,-45.593 20.777,-45.568 21.514,-44.907
pads on no net: _drivermotor1.11 _drivermotor2.11 _drivermotor3.11 _drivermotor4.11 BL1_drivermotor1.0 BL1_drivermotor2.0 BL1_drivermotor3.0 BL1_drivermotor4.0 madarshoot1.0 MPU6050.2 MPU6050.3 MPU6050.4 MPU6050.5 MPU6050.6 MPU6050.7 MPU6050.12 MPU6050.14 MPU6050.15 MPU6050.16 MPU6050.17 MPU6050.19 MPU6050.21 MPU6050.22 OSC-FPGA.1 Programmer.3 Programmer.4 S3.0 S3.3 S4.0 U5.2 U6.2 U7.2 U13.2 U13.9 U13.12 U13.13 U13.14 U13.15 U13.16

## Polygon pours and split planes (outlines as drawn)
GND on Top Layer "Bottom Layer-No Net" (hatched 45Degree grid 0.2 track 0.2, remove dead copper, pour order 25): -0.635,39.014 -35.585,39.014 -38.075,36.525 -57.023,8.026 -57.023,-19.863 -50.571,-26.949 -39.497,-38.075 41.148,-38.075 59.436,-19.888 59.436,6.782 37.287,39.014
AGND on Top Layer "Bottom Layer-No Net" (hatched 45Degree grid 0.2 track 0.2, remove dead copper, pour order 29): -42.22,48.108 -68.176,9.095 -68.153,-22.86 -20.273,-70.714 20.422,-70.714 68.174,-22.708 68.351,8.712 42.007,48.108 -42.164,48.108 -38.049,42.24 35.941,42.113 39.421,42.088 61.747,8.407 62.967,6.426 63.017,-21.946 44.78,-39.98 -44.78,-39.903 -62.84,-21.768 -62.84,8.103 -41.986,39.929 -38.024,42.291
GND on Bottom Layer "Top Layer-No Net 1" (hatched 45Degree grid 0.2 track 0.203, remove dead copper, pour order 5): -42.139,47.625 41.935,47.625 67.818,8.814 67.818,-22.86 20.295,-70.383 -20.142,-70.358 -67.97,-22.606 -67.945,8.89 -42.139,47.625

## Keep-outs
Keep-Out Layer:
  lines w0.254: -68.176,-22.837 -68.176,9.095 -42.22,48.108 42.007,48.108 68.199,8.845 68.199,-22.936 20.422,-70.714 -20.273,-70.714 -68.176,-22.837

## Other copper
Top Layer:
  region net MW1_DriverMotor4: 48.996,23.452 48.098,24.801 46.294,23.599 47.193,22.25
  region net MW3_DriverMotor4: 51.134,20.145 50.235,21.493 48.432,20.291 49.331,18.943
  region net MW2_DriverMotor4: 50.067,21.872 49.168,23.22 47.365,22.018 48.264,20.67
  region net VSS: 21.488,-46.939 22.758,-45.669 21.488,-44.399 20.218,-45.669
  rectangle net 3.3V: -7.493,-28.423 -5.842,-26.594
  region net MW2_DriverMotor1: -52.983,17.059 -51.174,15.931 -50.351,17.25 -52.161,18.378
  region net MW3_DriverMotor1: -51.865,18.761 -50.056,17.633 -49.234,18.952 -51.043,20.08
  region net MW1_DriverMotor1: -53.999,15.433 -52.19,14.305 -51.367,15.625 -53.177,16.753
  region net MW1_DriverMotor2: -43.472,-36.462 -41.923,-34.912 -43.066,-33.769 -44.615,-35.319
  region net MW2_DriverMotor2: -44.78,-34.874 -43.421,-33.515 -44.561,-32.376 -45.92,-33.735
  region net MW3_DriverMotor2: -44.853,-32.058 -45.949,-30.963 -47.422,-32.436 -46.326,-33.531
  region net MW1_DriverMotor3: 49.644,-30.213 50.864,-28.994 49.353,-27.484 48.134,-28.703
  region net MW2_DriverMotor3: 48.057,-31.521 49.174,-30.404 47.866,-29.096 46.749,-30.213
  region net MW3_DriverMotor3: 46.817,-33.04 47.904,-31.953 46.431,-30.48 45.344,-31.567
  text "-" at 12.446,43.002 h0.8
  text "+" at 2.815,41.427 h0.8
  text "ST" at 41.199,40.843 h0.8 r303.69
  text "+" at -27.889,39.192 h0.8 r45
  text "D" at 43.18,38.43 h0.8 r303.69
  text "C" at 43.917,37.262 h0.8 r303.69
  text "M0" at -43.993,36.195 h1 r236.31
  text "KN2C" at -10.643,35.535 h3.3
  text "V" at 44.882,35.128 h0.8 r303.69
  text "Small Size Team" at -10.516,34.265 h0.9
  text "-" at -39.193,31.821 h0.8 r45
  text "1" at -27.127,8.052 h0.8 r56.31
  text "M3" at 64.465,6.198 h1 r125
  text "1" at -62.586,-1.219 h0.8 r270
  text "3" at -62.636,-3.861 h0.8 r270
  text "M1" at -62.509,-23.393 h1 r315
  text "M2" at 60.884,-23.851 h1 r45
  text "1" at -1.93,-30.201 h0.8
  text "GND" at -36.779,-46.507 h0.8 r315
  text "+" at 35.382,-49.149 h1 r45
  text "+" at -28.524,-55.27 h1 r45
  text "GND" at 27.483,-56.642 h0.6 r45
  text "OFF" at -32.664,-56.794 h1.5 r315
  text "ON" at 30.658,-58.776 h1.5 r45
Bottom Layer:
  region net SW2: -21.311,-46.152 -22.847,-44.615 -24.155,-45.923 -22.619,-47.46
  region net VKICKER: -23.19,-47.955 -24.727,-46.419 -26.035,-47.727 -24.498,-49.263
  region net SW1: 23.305,-48.628 24.714,-47.219 23.493,-45.997 22.083,-47.407
  region net VSS: 21.463,-46.914 22.986,-45.391 21.703,-44.108 20.18,-45.631
  pour cut-out: 5.351,-62.815 5.351,-63.608 cw(c-2.269,-63.608) 3.119,-68.997 1.217,-70.898 14.252,-70.898 cw(c14.252,-71.082) 14.382,-70.952 13.399,-69.969 cw(c18.787,-64.581) 11.167,-64.581 11.167,-63.032
  pour cut-out: -10.717,-63.709 -11.225,-63.742 -11.155,-64.511 cw(c-18.774,-64.644) -13.292,-69.938 -14.709,-71.863 -1.676,-71.635 cw(c-1.673,-71.819) -1.545,-71.687 -2.471,-70.718 cw(c2.822,-65.237) -4.796,-65.37 -4.898,-63.824
  pour cut-out: -54.009,15.675 -54.659,16.13 cw(c-50.288,22.372) -57.793,21.048 -58.26,23.697 -65.736,13.019 cw(c-65.887,13.125) -65.855,12.944 -64.491,12.917 cw(c-63.168,5.413) -58.797,11.655 -57.713,10.77
  pour cut-out: -45.348,29.34 -45.772,30.009 cw(c-41.402,36.251) -48.906,34.927 -49.598,37.362 -57.075,26.685 cw(c-57.225,26.79) -57.194,26.609 -55.881,26.532 cw(c-54.557,19.027) -50.187,25.269 -48.861,24.699
  pour cut-out: 48.395,24.041 49.052,24.484 cw(c53.313,18.167) 54.767,25.647 57.407,25.134 50.118,35.94 cw(c50.271,36.043) 50.09,36.078 49.564,35.289 cw(c42.084,36.743) 46.345,30.426 45.022,29.679
  pour cut-out: 57.513,10.833 58.171,11.276 cw(c62.432,4.959) 63.886,12.439 66.526,11.926 59.237,22.732 cw(c59.389,22.835) 59.209,22.87 58.943,21.506 cw(c51.463,22.96) 55.724,16.642 54.44,15.776
  pour cut-out: 50.192,-30.147 50.753,-30.708 cw(c45.364,-36.096) 52.984,-36.096 52.984,-38.786 62.202,-29.569 cw(c62.332,-29.699) 62.332,-29.515 61.082,-29.206 cw(c61.082,-21.586) 55.694,-26.974 54.805,-25.874
  pour cut-out: 38.685,-41.653 39.181,-42.333 cw(c33.793,-47.722) 41.413,-47.722 41.478,-50.292 50.695,-41.075 cw(c50.825,-41.205) 50.825,-41.021 49.779,-40.433 cw(c49.779,-32.813) 44.391,-38.201 43.275,-37.122
  pour cut-out: -42.542,-36.603 -43.103,-37.164 cw(c-48.492,-31.775) -48.492,-39.395 -51.181,-39.395 -41.964,-48.613 cw(c-42.094,-48.743) -41.91,-48.743 -41.499,-47.493 cw(c-33.879,-47.493) -39.268,-42.105 -38.145,-41.346
  pour cut-out: -53.998,-25.223 -54.559,-25.784 cw(c-59.947,-20.396) -59.947,-28.016 -62.636,-28.016 -53.419,-37.233 cw(c-53.549,-37.363) -53.365,-37.363 -53.056,-36.342 cw(c-45.436,-36.342) -50.825,-30.954 -49.6,-29.891

## Silkscreen, mask and mechanical layers (free items; w line width, h text height)
Top Solder:
  region: 49.721,-30.213 50.838,-29.096 49.352,-27.61 48.235,-28.727
  region: 48.235,-31.623 49.352,-30.505 47.981,-29.134 46.863,-30.251
  region: 46.761,-32.944 47.879,-31.826 46.507,-30.455 45.39,-31.572
  region: -53.948,15.408 -52.139,14.28 -51.316,15.599 -53.126,16.727
  region: -51.789,18.735 -50.045,17.648 -49.241,18.938 -50.985,20.025
  region: -52.881,17.033 -51.137,15.946 -50.333,17.236 -52.078,18.323
  region: -42.164,-34.976 -43.167,-33.972 -44.537,-35.342 -43.534,-36.346
  region: -43.637,-33.503 -44.64,-32.499 -46.01,-33.869 -45.007,-34.872
  region: -44.907,-32.283 -45.91,-31.28 -47.28,-32.65 -46.277,-33.653
  region: 48.768,23.546 47.981,24.726 46.369,23.652 47.156,22.471
  region: 49.962,21.793 49.175,22.974 47.563,21.899 48.35,20.719
  region: 51.003,20.218 50.216,21.399 48.604,20.324 49.391,19.144
  rectangle: -7.569,-28.931 -5.74,-26.772
Bottom Solder:
  region: -22.581,-47.244 -21.577,-46.241 -22.986,-44.832 -23.989,-45.835
  region: -24.486,-49.2 -23.482,-48.196 -24.891,-46.788 -25.894,-47.791
  region: 22.821,-45.327 21.817,-44.324 20.409,-45.733 21.412,-46.736
  region: 24.638,-47.092 23.635,-46.088 22.226,-47.497 23.229,-48.5
  lines w0.254: -13.868,-65.913 cw(c-13.868,-66.22) -13.652,-66.003 ; 67.423,-0.2 67.589,-1.067
  lines w2: -48.412,26.441 -54.895,25.121 -65.532,9.042 -65.608,-23.317 -40.564,-48.387 ; -27.051,-40.834 -29.937,-40.834 -37.44,-48.336 -40.629,-48.336 -32.091,-56.55 -28.593,-56.533 -19.837,-47.777 -18.313,-47.777 ; -15.608,-45.796 -18.141,-48.33 -13.818,-52.653 -13.816,-66.473 ; -13.843,-65.75 ccw(c-11.303,-65.75) -13.099,-67.546 -12.002,-68.643 ; -13.132,-48.768 -10.236,-51.587 -8.371,-53.36 ; -11.801,-68.824 ccw(c-10.206,-66.847) -10.518,-69.367 ; -10.972,-69.317 12.068,-69.314 14.376,-67.005 14.376,-62.132 30.048,-46.457 42.706,-46.455 66.802,-22.354 66.802,8.306 ; -8.554,-58.109 -8.377,-53.516 8.539,-53.338 10.236,-51.537 ; 56.972,13.818 59.334,15.366 62.385,14.731 66.526,8.414

## Text inside footprints (layer, text, board x,y; h text height)
FT245: Top Overlay "2" at -57.887,1.626 h1.27 r270; Top Overlay "1" at -60.427,1.626 h1.27 r270; Top Overlay "14" at -57.887,-18.694 h1.27 r270; Top Overlay "13" at -60.427,-18.694 h1.27 r270
P7: Top Overlay "2" at -4.293,-25.705 h1.27; Top Overlay "1" at -3.785,-28.245 h1.27; Top Overlay "9" at 9.931,-28.245 h1.27; Top Overlay "10" at 9.931,-25.705 h1.27
Programmer: Top Overlay "6" at -27.59,17.139 h1.27 r56.31; Top Overlay "5" at -25.476,15.73 h1.27 r56.31; Top Overlay "2" at -32.662,9.531 h1.27 r56.31; Top Overlay "1" at -30.267,8.545 h1.27 r56.31